# Altium PCB PCB2.PcbDoc
Units mm, origin at the board's own origin, x right, y up, seen from the top; angles counter-clockwise.
Board outline 130 x 140 mm, 2 copper layers (Top Layer, Bottom Layer); 37 components, 42 nets, 192 pads, 80 vias.
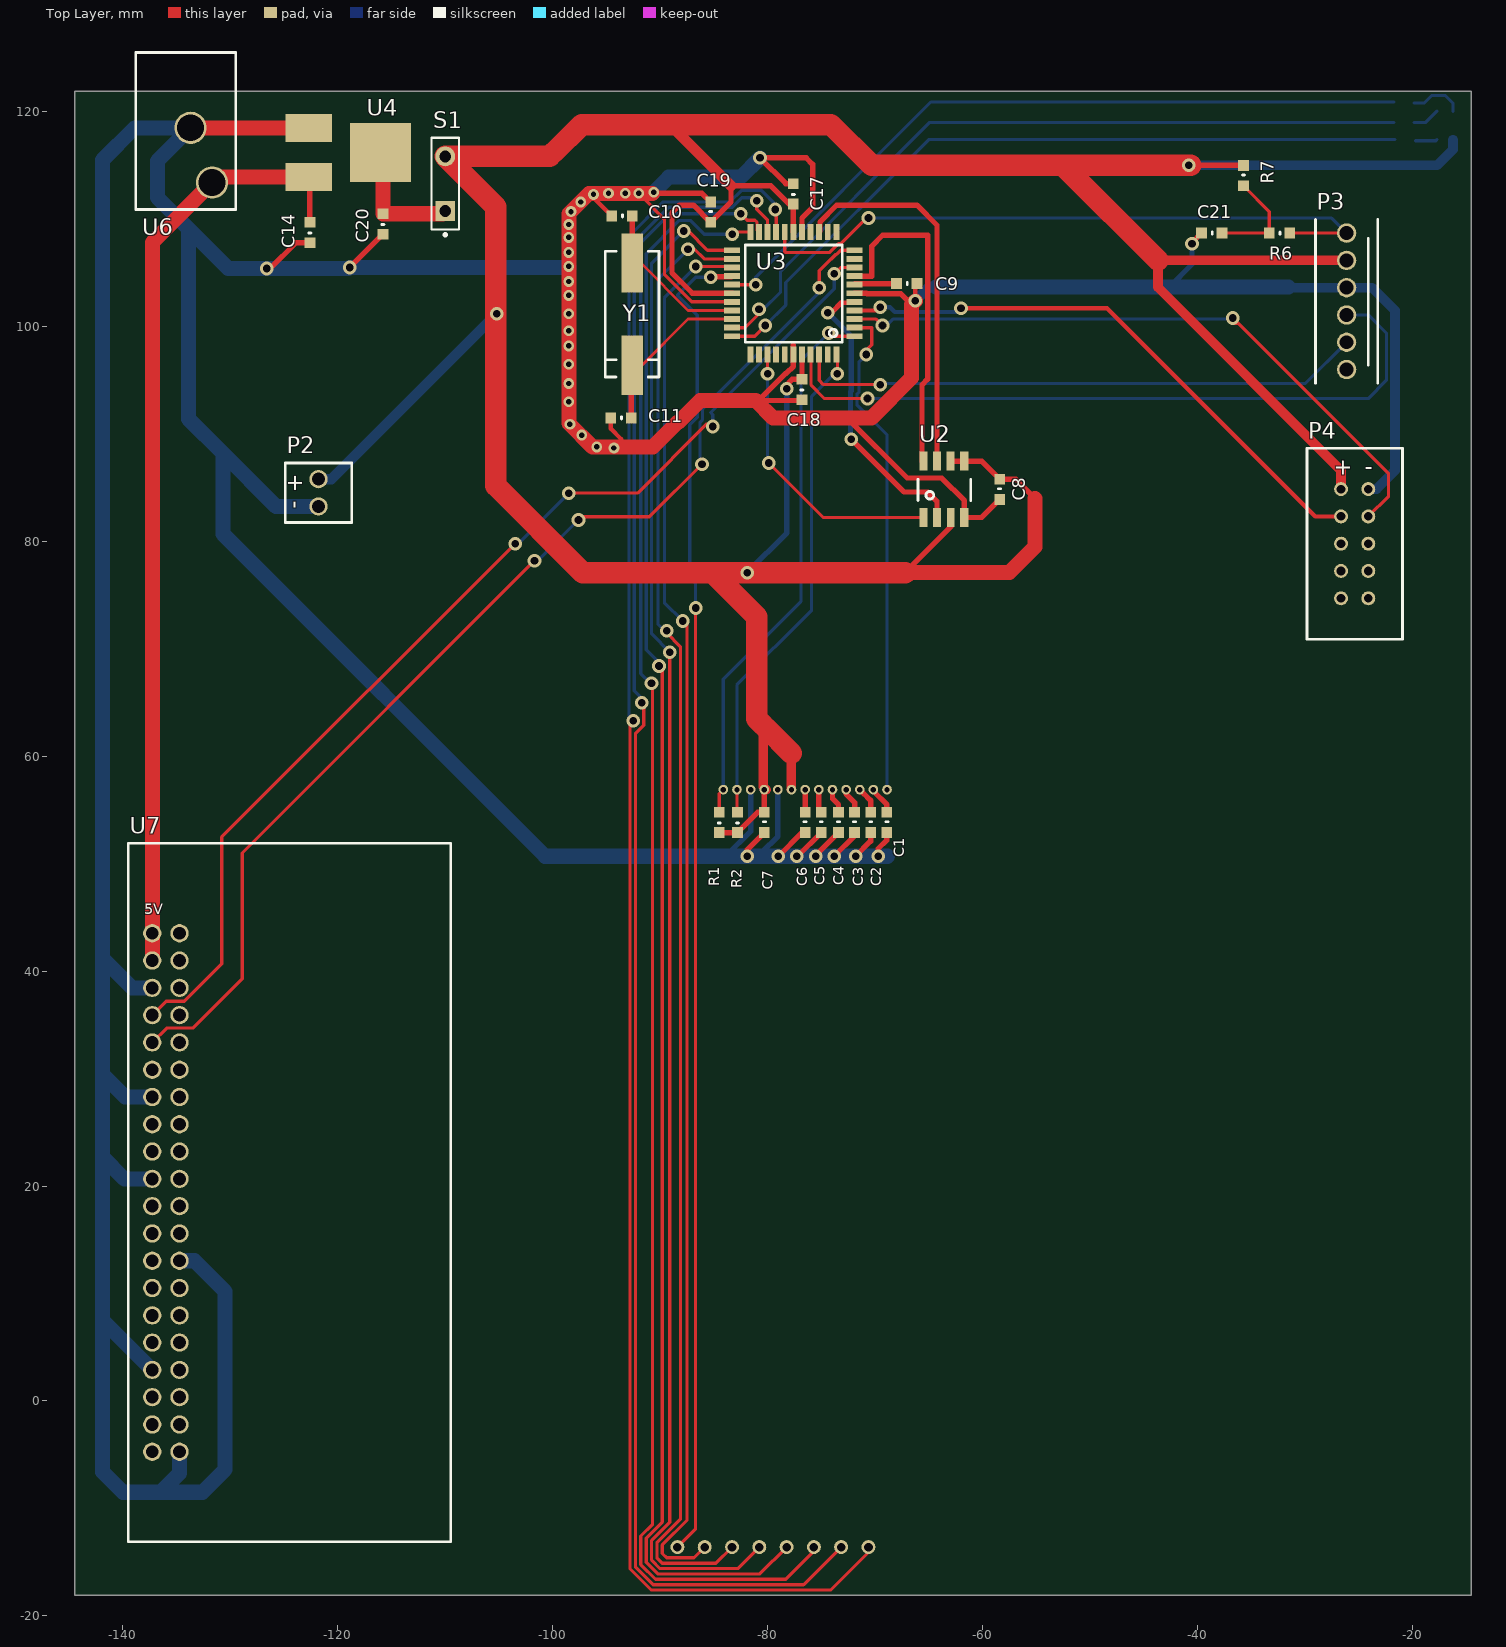
[diagram p0: Top Layer view]
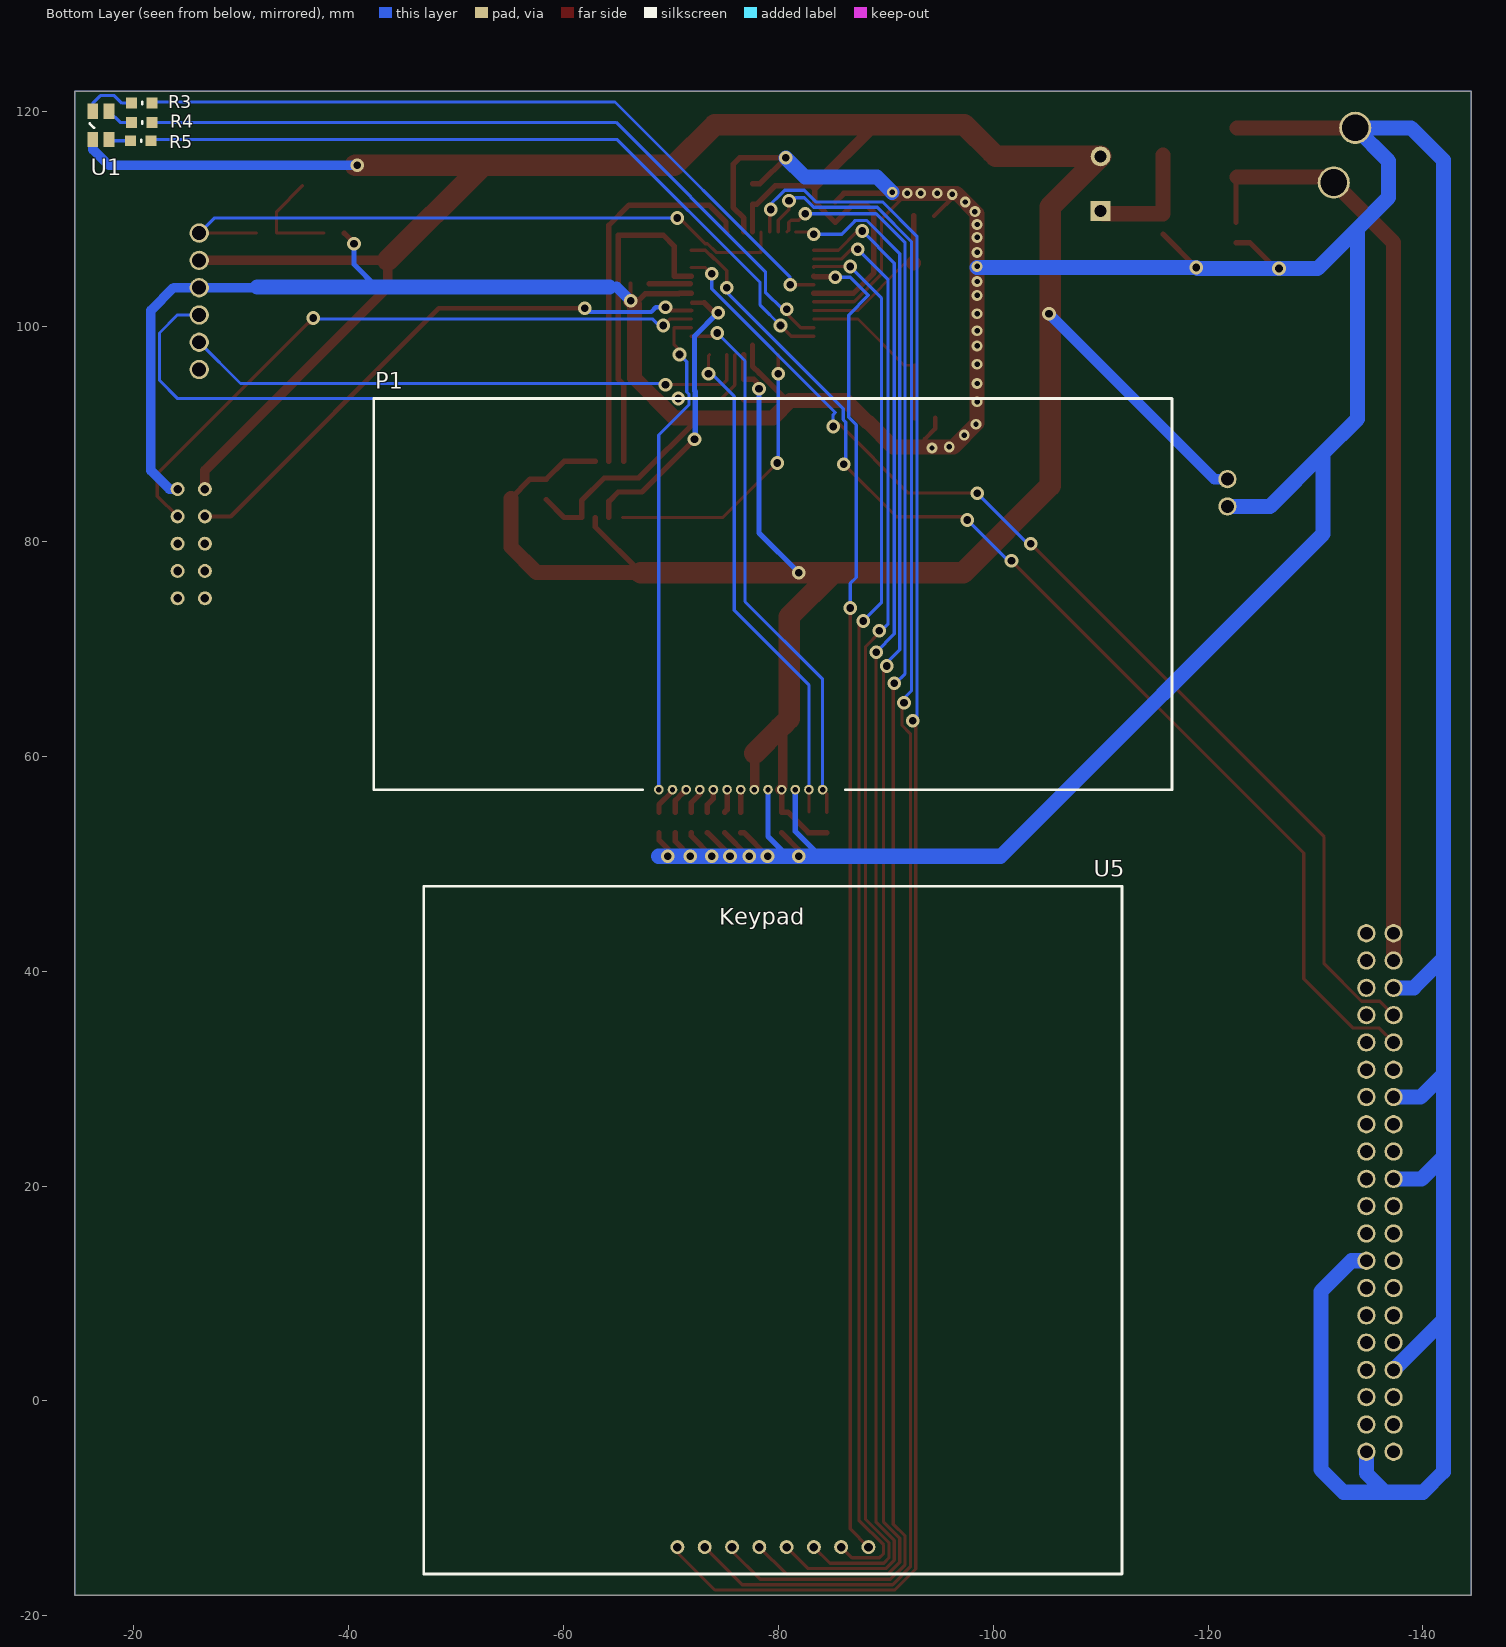
[diagram p1: Bottom Layer view, seen from below]

## Layer stack, top to bottom
Top Solder: solder mask 0.0102, Solder Resist, Dk 3.5
Top Layer: signal copper 0.0356
Dielectric 1: dielectric 0.32, FR-4, Dk 4.8
Bottom Layer: signal copper 0.0356
Bottom Solder: solder mask 0.0102, Solder Resist, Dk 3.5

## Board outline
-144.5,-18.1 -14.5,-18.1 -14.5,121.9 -144.5,121.9

## Design rules (kind name [scope] priority, off if disabled: settings)
Clearance [All] p1: gap=0.2
HoleSize [All] p1: absolutevalues=TRUE maxlimit=2.54 minlimit=0.3 maxpercent=80.000 minpercent=20.000
MinimumSolderMaskSliver [All] p1: minsoldermaskwidth=0
PolygonConnect [All] p1: connectstyle=Relief reliefconductorwidth=0.254 reliefentries=4 polygonreliefangle="90 Angle" airgapwidth=0.254
RoutingVias [All] p1: holewidth=0.711 width=1.27 viastyle="Through Hole" minholewidth=0.3 minwidth=0.7 maxholewidth=2 maxwidth=3
SolderMaskExpansion [All] p1: expansion=0.102
UnpouredPolygon [All] p1: allowunpoured=FALSE
Width [All] p1: maxlimit=2 minlimit=0.2 preferedwidth=0.254
27 further rules are at their usual default settings.

## Classes and differential pairs
component class Flash: C8 U2
component class LCD: C1 C2 C3 C4 C5 C6 C7 P1 P2 R1 R2
component class Led: R3 R4 R5 U1
component class PIC: C9 C10 C11 C14 C17 C18 C19 C20 C21 P3 R6 R7 S1 U3 U4 U6 Y1
component class "Raspberry Pi": U7
component class RFID: P4

## Components (designator, comment, footprint, x,y, rotation, side; value= is the part's Value field where it differs from the comment)
C1 "Cap" 0603 -68.9,52.9 r90 top
C2 "Cap" 0603 -70.4,52.9 r90 top
C3 "Cap" 0603 -71.9,52.9 r90 top
C4 "Cap" 0603 -73.4,52.9 r90 top
C5 "Cap" 0603 -75,52.9 r90 top
C6 "Cap" 0603 -76.5,52.9 r90 top
C7 "Cap" 0603 -80.3,52.9 r90 top
C8 "Cap" 0603 -58.4,83.9 r90 top
C9 "Cap" 0603 -68,104 r0 top
C10 "Cap" 0603 -94.5,110.3 r0 top
C11 "Cap" 0603 -94.6,91.5 r0 top
C14 "Cap Pol1" 0603 -122.6,109.7 r270 top
C17 "Cap" 0603 -77.6,113.3 r270 top
C18 "Cap" 0603 -76.8,95.1 r270 top
C19 "Cap" 0603 -85.3,109.7 r90 top
C20 "Cap Pol1" 0603 -115.8,110.5 r270 top
C21 "Cap" 0603 -39.6,108.7 r0 top
P1 "LCD" lcd -42.35,56.9 r180 bottom
P2 "lcd backlight" "lcd bk" -121.8,85.8 r270 top
P3 "ISCP" ISCP -26.1,108.7 r270 top
P4 "UEXT connector" "Conneteur UEXT" -29.8,70.9 r0 top
R1 "Res2" 0603 -84.5,54.8 r270 top
R2 "Res2" 0603 -82.8,54.8 r270 top
R3 "Res2" 0603 -19.8,120.8 r180 bottom
R4 "Res2" 0603 -19.8,119 r180 bottom
R5 "Res2" 0603 -19.7,117.3 r180 bottom
R6 "Res2" 0603 -33.3,108.7 r0 top
R7 "Res2" 0603 -35.7,113.1 r90 top
S1 "SW-SPST" SPST-2 -110,113.3 r90 top
U1 "ledRGB" "LED RGB" -16.2,117.4 r180 bottom
U2 "Flash" flash -65.5,82.8 r0 top
U3 "PIC32_1" PIC32 -73.6,97.4 r180 top
U4 "regulateur" regulateur -122.7,118.5 r270 top
U5 "clavier" keypad -47,-16.1 r180 bottom
U6 "alim" Alim -129.5,110.9 r0 top
U7 "Raspberry_pi_zero_w" RASPB -139.5,-13.1 r0 top
Y1 "Quartz 8MHz" quartz -92.6,96.4 r90 top

## Footprints (in the part's own frame and the unit in brackets; to place one, negate y for a bottom-side part, rotate by r counter-clockwise, add the part's x,y. Pads: shape width x height; smd on the part's side, far side on the other; paste and mask are expansions set on the pad)
0603 [mm]
  rect 1x1 smd: 1(0,0) 2(1.9,0)
  silkscreen extent 1,-0.1 1,0.1
Alim [mm]
  round 3 hole 2.5: 1(-2.2,2.5) 2(-4.2,7.6)
  silkscreen extent -9.3,0 0,14.6
"Conneteur UEXT" [mm]
  round 1.3 hole 0.8: 1(3.175,13.97) 2(5.715,13.97) 3(3.175,11.43) 4(5.715,11.43) 5(3.175,8.89) 6(5.715,8.89) 7(3.175,6.35) 8(5.715,6.35) 9(3.175,3.81) 10(5.715,3.81)
  silkscreen extent 0,0 8.89,17.78
flash [mm]
  rect 0.76x1.78 smd: 1(0,-0.572) 2(1.27,-0.572) 4(3.81,-0.572) 5(0,4.68) 6(1.27,4.68) 7(2.54,4.68) 8(3.81,4.68)
  rect 0.72x1.78 smd: 3(2.54,-0.572)
  silkscreen extent -0.5,1 4.4,3
ISCP [mm]
  round 1.8 hole 1.3: GND(5.08,0) PGC(10.16,0) PGD(7.62,0) PGM(12.7,0) RST(0,0) VCC(2.54,0)
  silkscreen extent -1.27,-2.9 13.97,2.9
keypad [mm]
  round 1.3 hole 0.8: 1(23.61,2.5) 2(26.15,2.5) 3(28.69,2.5) 4(31.23,2.5) 5(33.77,2.5) 6(36.31,2.5) 7(38.85,2.5) 8(41.39,2.5)
  silkscreen extent 0,0 65,64
lcd [mm]
  round 0.9 hole 0.5: 1(26.53,0) 2(27.8,0) 3(29.07,0) 4(30.34,0) 5(31.61,0) 6(32.88,0) 7(34.15,0) 8(35.42,0) 9(36.69,0) 10(37.96,0) 11(39.23,0) 12(40.5,0) 13(41.77,0)
  silkscreen extent 0,0 74.3,36.4
"lcd bk" [mm]
  round 1.7 hole 1.2: 1(0,0) 2(2.54,0)
  silkscreen extent -1.5,-3.1 4.04,3.1
"LED RGB" [mm]
  rect 1x1.4 smd: 1(0,0) 2(0,2.64) 3(1.5,2.64) 4(1.5,0)
  silkscreen extent -0.3,1.1 0.1,1.5
PIC32 [mm]
  rect 1.5x0.55 smd: 1(-1.7,-1.7) 2(-1.7,-2.5) 3(-1.7,-3.3) 4(-1.7,-4.1) 5(-1.7,-4.9) 6(-1.7,-5.7) 7(-1.7,-6.5) 8(-1.7,-7.3) 9(-1.7,-8.1) 10(-1.7,-8.9) 11(-1.7,-9.7) 23(9.7,-9.7) 24(9.7,-8.9) 25(9.7,-8.1) 26(9.7,-7.3) 27(9.7,-6.5) 28(9.7,-5.7) 29(9.7,-4.9) 30(9.7,-4.1) 31(9.7,-3.3) 32(9.7,-2.5) 33(9.7,-1.7)
  rect 0.55x1.5 smd: 12(0,-11.4) 13(0.8,-11.4) 14(1.6,-11.4) 15(2.4,-11.4) 16(3.2,-11.4) 17(4,-11.4) 18(4.8,-11.4) 19(5.6,-11.4) 20(6.4,-11.4) 21(7.2,-11.4) 22(8,-11.4) 34(8,0) 35(7.2,0) 36(6.4,0) 37(5.6,0.013) 38(4.8,0) 39(4,0) 40(3.2,0) 41(2.4,0) 42(1.6,0) 43(0.8,0) 44(0,0)
  silkscreen extent -0.56,-10.19 8.49,-1.14
quartz [mm]
  rect 5.5x2 smd: 1(0,0) 2(9.5,0)
  silkscreen extent -1.1,-2.5 10.6,2.5
RASPB [mm]
  round 1.7 hole 1.2: 1(4.77,56.63) 2(2.23,56.63) 3(4.77,54.09) 4(2.23,54.09) 5(4.77,51.55) 6(2.23,51.55) 7(4.77,49.01) 8(2.23,49.01) 9(4.77,46.47) 10(2.23,46.47) 11(4.77,43.93) 12(2.23,43.93) 13(4.77,41.39) 14(2.23,41.39) 15(4.77,38.85) 16(2.23,38.85) 17(4.77,36.31) 18(2.23,36.31) 19(4.77,33.77) 20(2.23,33.77) 21(4.77,31.23) 22(2.23,31.23) 23(4.77,28.69) 24(2.23,28.69) 25(4.77,26.15) 26(2.23,26.15) 27(4.77,23.61) 28(2.23,23.61) 29(4.77,21.07) 30(2.23,21.07) 31(4.77,18.53) 32(2.23,18.53) 33(4.77,15.99) 34(2.23,15.99) 35(4.77,13.45) 36(2.23,13.45) 37(4.77,10.91) 38(2.23,10.91) 39(4.77,8.37) 40(2.23,8.37)
  silkscreen extent 0,0 30,65
regulateur [mm]
  rect 2.6x4.3 smd: 1(0,0) 3(4.57,0)
  rect 5.5x5.7 smd: 4(2.285,6.665)
SPST-2 [mm] "Switch; 2 Leads"
  rect 1.85x1.85 hole 1.1: 1(-2.54,0)
  round 1.85 hole 1.1: 2(2.54,0)
  silkscreen extent -4.89,-1.27 4.28,1.27

## Part data
C1 C2 C3 C4 C5 C6 C7 C8 C9 C10 C11 C17 C18 C19 C21: "Capacitor"
C14 C20: "Polarized Capacitor (Radial)"
P1: library part "Header 13", "LCD Connector"
P2: library part "Header 2H", "Header, 2-Pin, Right Angle"
R1 R2 R3 R4 R5 R6 R7: "Resistor"
S1: "Single-Pole, Single-Throw Switch"
Y1: library part XTAL, "Crystal Oscillator"

## Via types
v1: diameter 1.27, hole 0.711, Top Layer to Bottom Layer, 57 vias
v2: diameter 1, hole 0.5, Top Layer to Bottom Layer, 23 vias

## Nets (pads, with @x,y where several pads share a name; then routed paths per layer and width w, separated by ;. In a path a pad name is that pad's centre, name@x,y a point inside that pad or via, vN(x,y) a via of type N, cw(c..) or ccw(c..) an arc to the next point about the centre after c; other vN are vias at no path point)
3.3V: C7.2 C8.2 C17.2 C18.1 C19.1 P1.8 P1.10 P2.1 P3.VCC P4.1 R1.2 R2.2 R7.2 S1.2 U1.1 U2.3 U2.7 U2.8 U3.17 U3.28 U3.40 | length 388.5
  Top Layer w0.5: R1.2 R2.2 -80.9,54.8 C7.2 ; U3.28 -87,103.1 -88.9,105 -88.9,110.6 -88.2,111.3 -86.9,111.3 C19.1 -83.4,111.6 -83.4,113.1 -79.7,113.1 -78,111.4 C17.2 U3.17 ; C7.2@-80.31,54.81 P1.10 ; v1(-78.2,94.2) -78,94.4 -78,94.8 -77.7,95.1 C18.1 U3.40 ; -67.2,77.1 -62.96,81.34 U2.3 ; U2.7 U2.8 -60.08,87.48 C8.2 -56.9,85.8 -55.1,84 ; v1@-40.6,115 R7.2
  Top Layer w0.9: -80.4,62.9 -80.4,57.15 P1.10@-80.15,56.9 ; P1.8@-77.8,56.93 -77.8,60.3 ; -43.66,106.16 -43.66,103.66 -26.625,86.625 P4.1 ; -43.5,106.16 P3.VCC
  Top Layer w1: -89.1,118.8 -83.4,113.1
  Top Layer w1.4: -67.2,77.1 -57.5,77.1 -55.1,79.5 -55.1,84
  Top Layer w2: -100.26,115.84 S1.2 -105.3,111.14 -105.3,85.2 -97.2,77.1 -85.1,77.1 ; -99.885,116.215 -97.3,118.8 -89.1,118.8 -74.1,118.8 -70.3,115 v1(-40.8,115) v1@-40.6,115 ; -80.4,62.9 -81,63.5 -81,73 -85.1,77.1 ; -80.15,62.65 -77.8,60.3 ; -67.2,77.1 v1(-81.9,77.1) -85.1,77.1 ; -52.2,114.7 -43.66,106.16
  Bottom Layer w0.5: v1(-81.9,77.1) -78.2,80.8 v1(-78.2,94.2) ; P1.8@-77.8,57.1 P1.8@-77.6,56.9
  Bottom Layer w0.9: v1(-40.8,115) -17.681,115 -16.2,116.481 U1.1
  Bottom Layer w1: P2.1 -120.6,85.8 v1(-105.2,101.2)
5V: C14.1 U4.3 U6.1 U7.2 U7.4 | length 87.3
  Top Layer w0.5: C14.1 U4.3@-122.6,113.83
  Top Layer w1.4: U7.4 U7.2 -137.27,107.83 U6.1 ; U6.1@-131.17,113.93 U4.3
GND: C1.1 C2.1 C3.1 C4.1 C5.1 C6.1 C7.1 C8.1 C9.2 C10.1 C11.1 C14.2 C17.1 C18.2 C19.2 C20.2 C21.1 P1.9 P1.11 P2.2 P3.GND P4.2 U2.4 U3.6 U3.16 U3.29 U3.39 U4.1 U6.2 U7.6 U7.14 U7.20 U7.25 U7.34 U7.39 | length 647.2
  Top Layer w0.3: v2(-92,112.4) -89.6,110 -89.6,104.851 -87.049,102.3 U3.29
  Top Layer w0.4: v2@-96.6,112.4 C10.1 ; C11.1 -94.6,90.5 -93.6,89.5 ; v1(-66.25,102.4) C9.2@-66.25,104
  Top Layer w0.5: v1(-126.6,105.4) -126.3,105.4 -123.9,107.8 C14.2 ; v1(-118.9,105.5) C20.2 ; v2@-90.6,112.4 -86.1,112.4 C19.2 ; v1(-81.9,50.7) -81.9,51.3 C7.1 ; -80.5,93.2 -80.415,93.115 -76.885,93.115 C18.2 ; -80.5,93.4 -80.5,93.434 -78.267,95.667 -78.233,95.667 -77.6,96.3 U3.39 -77.6,98.261 ; v1(-79,50.7) -76.8,52.9 C6.1 ; C17.1 -78.3,113.3 v1(-80.7,115.7) -76.4,115.7 -75.8,115.1 -75.8,111.1 -76.8,110.1 U3.16 ; v1(-77.3,50.7) -77.2,50.7 C5.1 ; v1@-75.55,50.75 C4.1 ; v1(-73.8,50.7) -71.9,52.6 C3.1 ; -72.6,91.5 -67,85.9 -63.8,85.9 -61.69,83.79 U2.4 -60.072,82.228 C8.1 ; U3.6 -70.8,103.1 -70.75,103.05 -67.6,103.05 v1@-66.6,102.05 ; v1(-71.8,50.7) -70.4,52.1 C2.1 ; v1(-69.7,50.7) -69.7,51.4 -68.9,52.2 C1.1 ; v1(-40.5,107.7) -40.5,107.8 C21.1
  Top Layer w1.4: U6.2 U4.1 ; v2@-95.1,112.4 v2(-93.25,112.4) ; v2@-90.7,112.4 v2(-92,112.4) -94.5,112.4 -96.6,112.4 -98.5,110.5 v2(-98.5,101.2) v2(-98.5,98.2) v2(-98.5,96.5) v2(-98.5,94.7) v2(-98.5,93) -98.5,91 -96.3,88.8 -90.685,88.8 -88.435,91.05 -88.35,91.05 -86.3,93.1 -81.1,93.1 -79.5,91.5 -72.6,91.5 -70.329,91.5 -66.6,95.229 -66.6,102.05 v1(-66.25,102.4)
  Bottom Layer w0.5: -83.8,50.8 -81.58,53.02 P1.11 ; -80.5,51.08 -79.04,52.54 P1.9 ; -42.6,103.7 -40.5,105.8 v1(-40.5,107.7)
  Bottom Layer w0.9: -31.28,103.62 P3.GND -23.72,103.62 -21.6,101.5 -21.6,86.6 -23.33,84.87 P4.2
  Bottom Layer w1: v1(-66.25,102.4) -64.95,103.7
  Bottom Layer w1.4: -141.88,7.5 U7.34 U7.34@-137.29,2.89 ; U7.20 -139.87,20.67 -141.9,22.7 ; U7.14 -139.79,28.29 -141.9,30.4 ; U7.6 -139.15,38.45 -141.9,41.2 ; U7.39 -134.73,-6.73 -136.5,-8.5 ; U7.25 -133.35,13.05 -130.5,10.2 -130.5,-6.4 -132.6,-8.5 -136.5,-8.5 ; P2.2 -125.76,83.26 -130.7,88.2 ; v1@-119,105.4 v1(-126.6,105.4) -130.2,105.4 -133.9,109.1 ; v1(-118.9,105.5) v2@-98.5,105.5 ; v2(-90.6,112.5) -89.2,113.9 -82.5,113.9 v1(-80.7,115.7) ; -68.85,50.7 v1(-71.8,50.7) v1(-81.9,50.7) -100.7,50.7 -130.7,80.7 -130.7,88.2 ; -64.3,103.7 -31.5,103.7 ; -141.9,22.7 -141.9,-6.6 -140,-8.5 -136.5,-8.5 ; -141.9,22.7 -141.9,30.4 ; -141.9,30.4 -141.9,41.2 ; -141.9,41.2 -141.9,115.5 -138.9,118.5 U6.2 -136.8,115.4 -136.8,112 -133.9,109.1 ; -133.9,109.1 -133.9,91.4 -130.7,88.2
  other v1: -75.5,50.7
  other v2: -94.3,88.7 -95.9,88.8 -97.3,89.9 -98.4,90.9 -98.5,99.6 -98.5,102.9 -98.5,104.2 -98.5,105.6 -98.5,106.9 -98.5,108.3 -98.5,109.5 -98.3,110.7 -97.4,111.6 -96.2,112.3 -94.8,112.4
MCLR: P3.RST R6.2 U3.18 | length 61.4
  Top Layer w0.3: U3.18 -78.4,106.9 -74.207,106.9 -73.407,107.7 -73.18,107.7 -71.04,109.84 -70.86,109.84 v1(-70.6,110.1) ; R6.2 P3.RST
  Bottom Layer w0.3: v1(-70.6,110.1) -27.5,110.1 P3.RST
NetC1_2: C1.2 P1.2 | length 2.6
  Top Layer w0.5: P1.2 -70.15,56.75 -68.9,55.5 C1.2
NetC2_2: C2.2 P1.3 | length 2.5
  Top Layer w0.5: P1.3 -71.05,56.53 -71.05,56.527 -70.523,56 -70.52,56 -70.4,55.88
  Top Layer w0.54: C2.2 -70.4,55.88
NetC3_2: C3.2 P1.4 | length 2.4
  Top Layer w0.5: P1.4 -72.69,56.49 -71.9,55.7 C3.2
NetC4_2: C4.2 P1.5 | length 2.3
  Top Layer w0.5: P1.5 -73.96,56.06 -73.4,55.5 C4.2
NetC5_2: C5.2 P1.6 | length 2.2
  Top Layer w0.5: P1.6 -75.23,55.03 C5.2
NetC6_2: C6.2 P1.7 | length 2.1
  Top Layer w0.5: C6.2 P1.7
NetC9_1: C9.1 U3.7 | length 3.8
  Top Layer w0.5: U3.7@-71.825,103.975 -68,103.975 C9.1
NetC20_1: C20.1 S1.1 U4.4 | length 11
  Top Layer w1.4: U4.4@-115.8,115.98 C20.1 S1.1@-110.26,110.5
NetC21_2: C21.2 R6.1 R7.1 | length 9.8
  Top Layer w0.3: C21.2 R6.1 -33.3,110.7 R7.1
NetP1_1: P1.1 U3.2 | length 46.4
  Top Layer w0.3: U3.2 -70.3,99.9 -70.3,98.3 -70.8,97.8 v1(-70.8,97.4)
  Bottom Layer w0.3: v1@-70.8,97.5 v1(-70.8,97.4) -71.485,96.715 -71.485,93.908 -71.685,93.708 -71.685,92.715 -68.88,89.91 P1.1
NetP1_12: P1.12 R2.1 U3.44 | length 46.6
  Top Layer w0.3: R2.1@-82.85,54.85 P1.12 ; U3.44 -73.5,97.3 v1(-73.5,95.6)
  Bottom Layer w0.3: P1.12 -82.85,66.65 -75.9,73.6 -75.9,93.5 -73.8,95.6 v1(-73.5,95.6)
NetP1_13: P1.13 R1.1 U3.1 | length 51.3
  Top Layer w0.3: R1.1 -84.5,56.52 P1.13 ; v1(-74.3,99.4) -74,99.1 U3.1
  Bottom Layer w0.3: P1.13 -84.12,67.18 -76.9,74.4 -76.9,96.8 v1(-74.3,99.4)
NetP4_3: P4.3 U3.4 | length 53.7
  Top Layer w0.4: U3.4 -69.8,101.5 v1(-69.5,101.8) ; v1(-62,101.7) -48.4,101.7 -29.03,82.33 P4.3
  Bottom Layer w0.4: v1(-69.5,101.8) -68.6,101.8 -68.165,101.365 -62.335,101.365 v1(-62,101.7)
NetP4_4: P4.4 U3.3 | length 60.9
  Top Layer w0.3: U3.3 -69.9,100.7 v1(-69.3,100.1) ; v1@-36.6,100.3 -36.2,100.3 -22.2,86.3 -22.2,84.215 P4.4
  Bottom Layer w0.3: v1(-69.3,100.1) -69.1,99.9 -68.285,100.715 -36.785,100.715 v1(-36.7,100.8)
NetR3_1: R3.1 U1.2 | length 4.9
  Bottom Layer w0.3: R3.1 -18.9,120.8 -18.2,121.5 -16.9,121.5 -16.2,120.8 U1.2
NetR3_2: R3.2 U3.27 | length 69.1
  Top Layer w0.3: U3.27 v1(-81.1,103.9)
  Bottom Layer w0.3: v1(-81.1,103.9) -81.1,104.6 -64.8,120.9 R3.2@-21.7,120.9
NetR4_1: R4.1 U1.3 | length 2.5
  Bottom Layer w0.3: R4.1 -18.74,119 U1.3
NetR4_2: R4.2 U3.32 | length 70.9
  Top Layer w0.3: U3.32 -82.1,99.9 -80.8,101.2 v1(-80.8,101.6)
  Bottom Layer w0.3: v1(-80.8,101.6) -80.4,101.6 -78.8,103.2 -78.8,105.1 -64.9,119 R4.2
NetR5_1: R5.1 U1.4 | length 2
  Bottom Layer w0.3: R5.1 -17.8,117.3 U1.4
NetR5_2: R5.2 U3.33 | length 70.5
  Top Layer w0.3: U3.33 -81.2,99.1 v1(-80.2,100.1)
  Bottom Layer w0.3: v1(-80.2,100.1) -78.3,102 -78.3,104.1 -65,117.4 R5.2@-21.6,117.4
NetU2_1: U2.1 U3.36 | length 26.6
  Top Layer w0.3: v1(-80,95.6) U3.36 ; v1(-79.9,87.3) -74.828,82.228 U2.1
  Bottom Layer w0.3: v1@-80,87.4 v1(-80,95.6)
  Bottom Layer w0.5: v1@-80,87.4 v1(-79.9,87.3)
NetU2_2: U2.2 U3.5 | length 27.5
  Top Layer w0.4: -73.1,102.225 U3.5@-71.975,102.225
  Top Layer w0.5: v1(-74.4,101.3) -74.025,101.3 -73.1,102.225 ; v1(-72.2,89.5) -67.3,84.6 -65.1,84.6 -64.23,83.73 U2.2
  Bottom Layer w0.5: v1(-74.4,101.3) -72.2,99.1 -72.2,94.042 -72.285,93.957 -72.285,89.585 v1(-72.2,89.5)
NetU2_5: U2.5 U3.8 | length 31.5
  Top Layer w0.3: -65.7,94.644 -65.55,94.794
  Top Layer w0.5: U3.8 -70.3,104.7 -70.3,107.5 -69.3,108.5 -65.1,108.5 -65.1,95.103 -65.629,94.573 U2.5@-65.629,87.48
NetU2_6: U2.6 U3.14 | length 35.2
  Top Layer w0.5: U3.14 -75.125,108.875 -75.125,109.736 -73.561,111.3 -66.1,111.3 -64.23,109.43 U2.6
NetU3_9: U3.9 U7.8 | length 103.1
  Top Layer w0.3: U7.8 -135.98,37.2 -134.283,37.2 -130.8,40.683 -130.8,52.5 v1(-103.5,79.8) ; v1(-98.5,84.5) -92.1,84.5 -85.7,90.9 -85.5,90.7 v1(-85.1,90.7) ; v1(-73.8,104.9) -73.2,105.5 U3.9
  Bottom Layer w0.3: v1(-103.5,79.8) -103.2,79.8 v1(-98.5,84.5) ; v1(-85.1,90.7) -85.1,91.8 -85.3,92 -73.8,103.5 v1(-73.8,104.9)
NetU3_11: U3.11 U7.10 | length 107.5
  Top Layer w0.3: U7.10 -135.94,34.7 -133.5,34.7 -128.9,39.3 -128.9,51 v1(-101.7,78.2) ; v1(-97.6,82) -97.3,82.3 -91,82.3 v1(-86.1,87.2) ; v1(-75.2,103.6) -75.2,105.2 -73.7,106.7 ; -74,106.3 -73.2,107.1 U3.11
  Bottom Layer w0.3: v1(-101.7,78.2) -101.4,78.2 v1(-97.6,82) ; v1(-86.1,87.2) -86.285,87.385 -86.285,91.106 -86.05,91.341 -86.05,92.35 -75.2,103.2 v1(-75.2,103.6)
NetU3_19: U3.19 U5.1 | length 168.1
  Top Layer w0.3: v1(-92.5,63.3) -92.8,63 -92.8,-15.643 -90.843,-17.6 -74.1,-17.6 -70.61,-14.11 U5.1 ; U3.19 v1@-79.2,110.6
  Bottom Layer w0.3: v1(-92.5,63.3) -92.9,63.3 -92.9,108.4 -89.7,111.6 -83.5,111.6 -82.415,112.685 -80.592,112.685 -78.853,110.946 v1@-78.853,110.746
  other v1: -79.3,110.9
NetU3_20: U3.20 U5.2 | length 162
  Top Layer w0.3: v1@-91.515,64.815 -91.515,62.892 -92.3,62.107 -92.3,-15.436 -90.636,-17.1 -76.65,-17.1 U5.2 ; v1(-81,111.7) -81,110.9 -80,109.9 U3.20
  Bottom Layer w0.3: v1(-91.7,65) -91.7,65.4 -92.4,66.1 -92.4,107.907 -89.207,111.1 -83.293,111.1 -82.408,111.985 -81.592,111.985 -81,111.393 v1(-81,111.7)
NetU3_21: U3.21 U5.3 | length 155.7
  Top Layer w0.3: v1(-90.8,66.8) -90.7,66.8 -90.7,-11.471 -91.8,-12.572 -91.8,-15.228 -90.428,-16.6 -78.3,-16.6 -75.69,-13.99 U5.3 ; v1(-82.5,110.5) -82.28,110.5 -82.39,110.39 -81.9,109.9 -81.18,109.9 -80.975,109.695 -80.975,108.975 U3.21
  Bottom Layer w0.3: v1(-90.8,66.8) -90.9,66.8 -91.8,67.7 -91.8,107.8 -89.1,110.5 v1(-82.5,110.5)
NetU3_22: U3.22 U5.4 | length 149.3
  Top Layer w0.3: v1(-90.1,68.4) -89.8,68.1 -89.8,-11.279 -91.3,-12.779 -91.3,-15.021 -90.221,-16.1 -80.73,-16.1 U5.4 ; v1(-83.3,108.6) -83.1,108.8 U3.22
  Bottom Layer w0.3: v1(-90.1,68.4) -90.1,68.7 -91.3,69.9 -91.3,106.793 -88.208,109.885 -87.115,109.885 -87.15,109.85 -85.9,108.6 v1(-83.3,108.6)
NetU3_23: U3.23 U5.5 | length 142.9
  Top Layer w0.3: v1@-89.2,69.7 v1(-89.1,69.7) -89.1,-11.286 -90.8,-12.986 -90.8,-14.814 -90.014,-15.6 -82.77,-15.6 U5.5 ; v1(-87.8,108.9) -87.4,108.9 -85.6,107.1 U3.23
  Bottom Layer w0.3: v1(-89.1,69.7) -90.8,71.4 -90.8,105.9 v1(-87.8,108.9)
NetU3_24: U3.24 U5.6 | length 137.4
  Top Layer w0.3: v1(-89.4,71.7) -89.4,71.5 -88.115,70.215 -88.115,-11.008 -90.3,-13.193 -90.3,-14.607 -89.807,-15.1 -84.81,-15.1 U5.6 ; v1(-87.4,107.2) -86.8,107.2 -85.9,106.3 U3.24
  Bottom Layer w0.3: v1(-89.4,71.7) -89.4,71.5 -90.2,72.3 -90.2,104.4 v1(-87.4,107.2)
NetU3_25: U3.25 U5.7 | length 130.8
  Top Layer w0.3: v1(-87.9,72.6) -87.5,72.2 -87.5,-11.1 -89.8,-13.4 -89.8,-14.2 -89.4,-14.6 -86.85,-14.6 U5.7 ; v1(-86.685,105.585) -83.3,105.585 U3.25
  Bottom Layer w0.3: v1(-87.9,72.6) -89.6,74.3 -89.6,102.67 v1(-86.685,105.585)
NetU3_26: U3.26 U5.8 | length 124.3
  Top Layer w0.3: U5.8 -86.7,-11.91 v1(-86.7,73.8)
  Top Layer w0.5: v1(-85.3,104.6) -85.275,104.625 -83.375,104.625 U3.26
  Bottom Layer w0.3: v1(-86.7,73.8) -86.7,76.091 -87.25,76.641 -87.25,90.848 -86.55,91.548 -86.55,101.07 -88.39,102.91 -86.7,104.6 v1(-85.3,104.6)
PGEC3: P3.PGC U3.42 | length 53.3
  Top Layer w0.3: U3.42 -75.2,95 -74.8,94.6 v1(-69.5,94.6)
  Bottom Layer w0.3: v1(-69.5,94.6) -69.4,94.7 -29.94,94.7 P3.PGC
PGED3: P3.PGD U3.41 | length 66.4
  Top Layer w0.3: U3.41 -75.95,97.35 -75.95,94.55 -74.7,93.3 v1(-70.7,93.3)
  Bottom Layer w0.3: v1(-70.7,93.3) -24.1,93.3 -22.4,95 -22.4,99.4 -24.08,101.08 P3.PGD
X1: C10.2 U3.30 Y1.2 | length 15.5
  Top Layer w0.254: Y1.2 -91.8,105.9 -87.4,101.5 U3.30
  Top Layer w0.5: Y1.2 C10.2
X2: C11.2 U3.31 Y1.1 | length 15.9
  Top Layer w0.254: Y1.1 -91.7,96.4 -87.4,100.7 U3.31
  Top Layer w0.5: C11.2 Y1.1@-92.7,96.3
pads on no net: P3.PGM P4.5 P4.6 P4.7 P4.8 P4.9 P4.10 U3.10 U3.12 U3.13 U3.15 U3.34 U3.35 U3.37 U3.38 U3.43 U7.1 U7.3 U7.5 U7.7 U7.9 U7.11 U7.12 U7.13 U7.15 U7.16 U7.17 U7.18 U7.19 U7.21 U7.22 U7.23 U7.24 U7.26 U7.27 U7.28 U7.29 U7.30 U7.31 U7.32 U7.33 U7.35 U7.36 U7.37 U7.38 U7.40

## Polygon pours and split planes (outlines as drawn)
GND on Bottom Layer "Bottom Layer-No Net" (solid, shelved, pour order 5): -144.5,121.9 -14.5,121.9 -14.5,-18.1 -144.5,-18.1

## Silkscreen, mask and mechanical layers (free items; w line width, h text height)
Top Solder:
  text "Crypto Transfer" at -81.1,38.6 h10
  text "Ξasy, Fast & Secured" at -85,29.6 h8
  text "E. Merabet" at -76.2,17.6 h4
  text "A. Calleja" at -75.8,11.2 h4
  text "L. Fujimoto" at -75.5,4.7 h4
  text "J. Murte" at -75.2,-2.2 h4
  text "42" at -30.5,-12.7 h8
Mechanical 1:
  lines w0.254: -144.5,-23.154 -144.5,-22.646 ; -142.976,-23.408 -144.5,-22.9 ; -142.976,-22.392 -144.5,-22.9 ; -86.685,-22.9 -144.5,-22.9 ; -72.415,-22.9 -14.6,-22.9 ; -16.124,-23.408 -14.6,-22.9 ; -16.124,-22.392 -14.6,-22.9 ; -14.6,-23.154 -14.6,-22.646 ; -10.903,-16.574 -10.4,-18.1 ; -10.654,-18.099 -10.146,-18.101 ; -10.413,120.478 -9.9,122 ; -10.18,43.545 -10.4,-18.1 ; -10.154,122.001 -9.646,121.999 ; -10.12,60.355 -9.9,122 ; -9.887,-16.578 -10.4,-18.1 ; -9.397,120.474 -9.9,122
  text "140.101 (mm)" at -9.265,43.796 h1.52 r89.8
  text "129.9 (mm)" at -86.431,-23.814 h1.52
Mechanical 2:
  the board outline again, w0.254
Mechanical 3:
  lines w1.2: -145.1,-18.1 ccw(c-144.5,-18.1) -144.5,-18.7 ; -145.1,-18.1 ccw(c-144.5,-18.1) -144.5,-18.7 ; -145.1,-18.1 -145.1,121.9 ; -145.1,121.9 cw(c-144.5,121.9) -144.5,122.5 ; -145.1,121.9 cw(c-144.5,121.9) -144.5,122.5 ; -144.5,-18.7 -14.5,-18.7 ; -144.5,122.5 -14.5,122.5 ; -14.5,-18.7 ccw(c-14.5,-18.1) -13.9,-18.1 ; -14.5,-18.7 ccw(c-14.5,-18.1) -13.9,-18.1 ; -14.5,122.5 cw(c-14.5,121.9) -13.9,121.9 ; -14.5,122.5 cw(c-14.5,121.9) -13.9,121.9 ; -13.9,-18.1 -13.9,121.9
Drill Drawing:
  circle w0.025: c10.565,107.218 r0.635
  lines w0.025: 9.93,95.47 10.248,95.47 10.248,95.153 10.883,95.153 10.883,95.47 11.2,95.47 11.2,96.105 10.883,96.105 10.883,96.423 10.248,96.423 10.248,96.105 9.93,96.105 9.93,95.47 ; 9.93,100.233 11.2,100.233 10.565,98.963 9.93,100.233 ; 9.93,102.773 11.2,102.773 11.2,104.043 9.93,104.043 9.93,102.773 ; 9.93,110.71 10.248,110.71 10.565,110.393 10.883,110.71 11.2,110.71 10.883,111.028 11.2,111.345 10.883,111.345 10.565,111.663 10.248,111.345 9.93,111.345 10.248,111.028 9.93,110.71 ; 9.93,114.203 10.565,114.52 11.2,114.203 10.883,114.838 11.2,115.473 10.565,115.155 9.93,115.473 10.248,114.838 9.93,114.203 ; 9.93,118.648 10.565,118.013 11.2,118.648 10.565,119.283 9.93,118.648
  lines w0.381: 8.2,94.01 106.726,94.01 ; 8.2,120.68 106.726,120.68 ; 22.192,90.2 22.192,124.49 ; 39.917,90.2 39.917,124.49 ; 74.095,90.2 74.095,124.49 ; 86.944,90.2 86.944,124.49 ; 8.2,90.2 106.726,90.2 106.726,124.49 8.2,124.49 8.2,90.2
  text "Symbol" at 10.486,121.823 h1.83
  text "Hit Count" at 23.335,121.823 h1.83
  text "Finished Hole Size" at 41.06,121.823 h1.83
  text "Plated" at 75.238,121.823 h1.83
  text "Hole Type" at 88.087,121.823 h1.83
  text "2" at 23.335,118.013 h1.52
  text "1.100mm (43.31mil)" at 41.06,118.013 h1.52
  text "PTH" at 75.238,118.013 h1.52
  text "Round" at 88.087,118.013 h1.52
  text "2" at 23.335,114.203 h1.52
  text "2.500mm (98.43mil)" at 41.06,114.203 h1.52
  text "PTH" at 75.238,114.203 h1.52
  text "Round" at 88.087,114.203 h1.52
  text "6" at 23.335,110.393 h1.52
  text "1.300mm (51.18mil)" at 41.06,110.393 h1.52
  text "PTH" at 75.238,110.393 h1.52
  text "Round" at 88.087,110.393 h1.52
  text "18" at 23.335,106.583 h1.52
  text "0.800mm (31.50mil)" at 41.06,106.583 h1.52
  text "PTH" at 75.238,106.583 h1.52
  text "Round" at 88.087,106.583 h1.52
  text "36" at 23.335,102.773 h1.52
  text "0.500mm (19.69mil)" at 41.06,102.773 h1.52
  text "PTH" at 75.238,102.773 h1.52
  text "Round" at 88.087,102.773 h1.52
  text "42" at 23.335,98.963 h1.52
  text "1.200mm (47.24mil)" at 41.06,98.963 h1.52
  text "PTH" at 75.238,98.963 h1.52
  text "Round" at 88.087,98.963 h1.52
  text "57" at 23.335,95.153 h1.52
  text "0.711mm (28.00mil)" at 41.06,95.153 h1.52
  text "PTH" at 75.238,95.153 h1.52
  text "Round" at 88.087,95.153 h1.52
  text "163 Total" at 23.335,91.343 h1.52

## Text inside footprints (layer, text, board x,y; h text height)
P2: Top Overlay "+" at -124.6,86.3 h1.52 r270; Top Overlay "-" at -124.6,83.8 h1.52 r270
P4: Top Overlay "-" at -24.4,86.2 h1.52; Top Overlay "+" at -27.3,86.2 h1.52
U5: Bottom Overlay "Keypad" at -74.5,44.3 h1.52
U7: Top Overlay "5V" at -138,45.3 h1